# Altium PCB BOARD.PcbDoc
Units mm, origin at the board's own origin, x right, y up, seen from the top; angles counter-clockwise.
Board outline 16 x 24 mm, 2 copper layers (Top Layer, Bottom Layer), stack 0.46 mm thick; 61 components, 35 nets, 149 pads, 0 vias.
Unrouted connection lines stored in the file: 110.
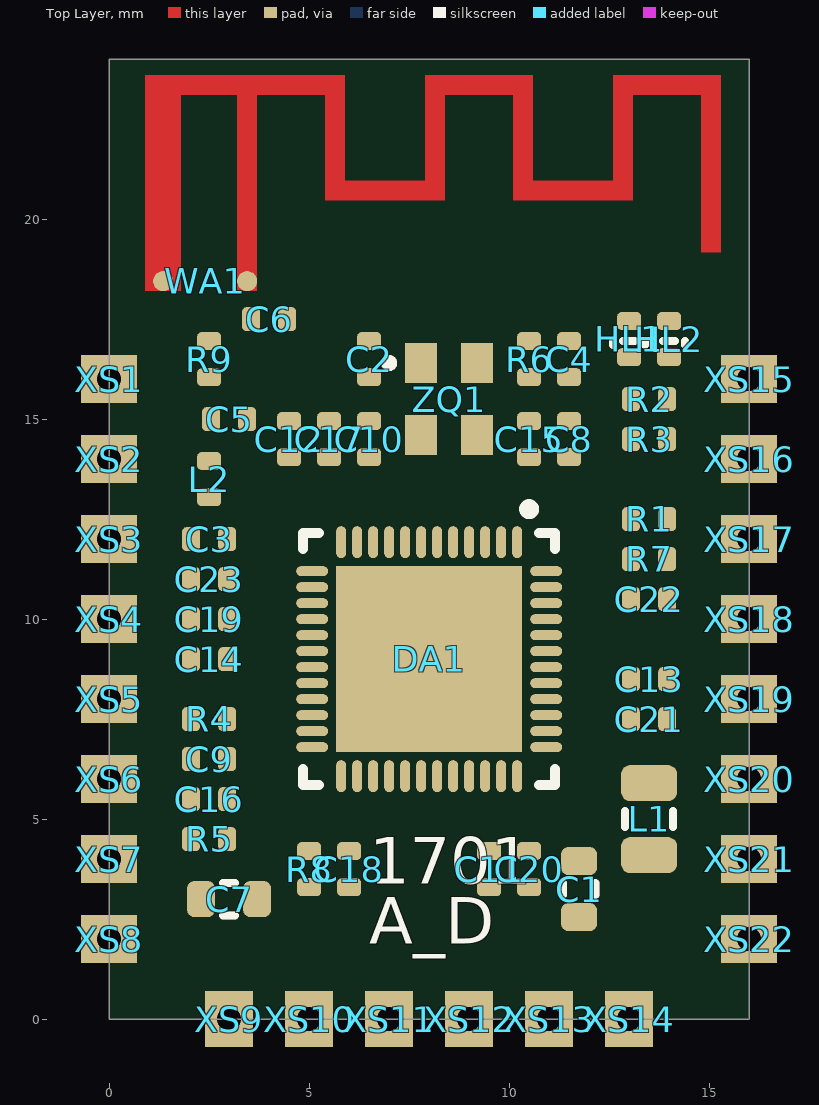
[diagram p0: Top Layer view]
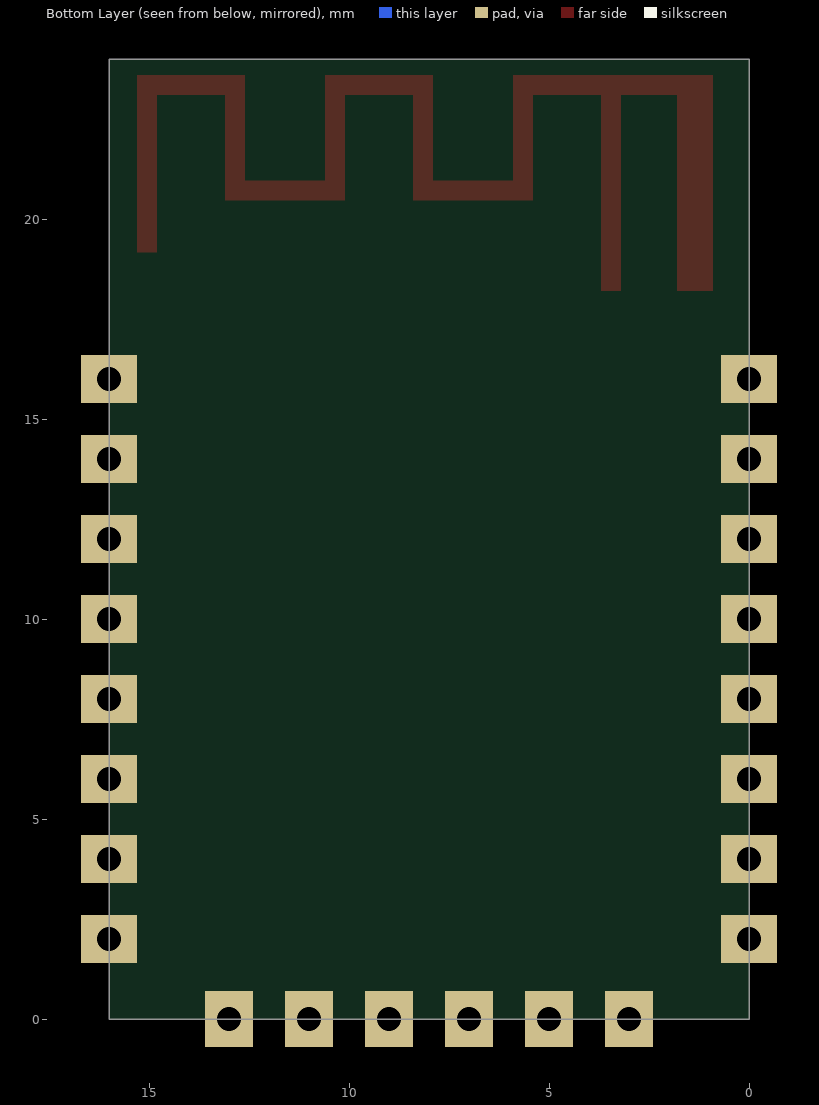
[diagram p1: Bottom Layer view, seen from below]

## Layer stack, top to bottom
Top Solder: solder mask 0.01, Solder Resist, Dk 3.5
Top Layer: signal copper 0.03
Dielectric1: core 0.4, FR-4, Dk 4.2
Bottom Layer: signal copper 0.03
Bottom Solder: solder mask 0.01, Solder Resist, Dk 3.5

## Board outline
0,0 16,0 16,24 0,24

## Design rules (kind name [scope] priority, off if disabled: settings)
Clearance Clearance_ANT [InNetClass('ANT_Class') vs InPolygon] p1: gap=0.6
Clearance Clearance_GND_Poly [(InNet('GND') AND InPolygon )] p2: gap=0.2
Clearance [All] p3: gap=0.15
ComponentClearance [All] p1 off: gap=0.25 collisioncheckmode=3 verticalgap=0.25 showdistances=FALSE
DiffPairsRouting [All] p1: maxlimit=0.4 minlimit=0.15 mostfreqgap=0.25 toplayer_minwidth=0.2 toplayer_maxwidth=0.4 toplayer_prefwidth=0.25 bottomlayer_minwidth=0.2 bottomlayer_maxwidth=0.4 bottomlayer_prefwidth=0.25 maxuncoupledlength=12
Height [All] p1: minheight=0 maxheight=25 prefheight=25
HoleSize [All] p1: absolutevalues=TRUE maxlimit=6 minlimit=0.3 maxpercent=80.000 minpercent=20.000
HoleToHoleClearance [All] p1: gap=0.25 allowstackedmicrovias=TRUE
MinimumSolderMaskSliver [All] p1 off: minsoldermaskwidth=0.254
PlaneClearance [All] p1: clearance=0.5
PlaneConnect [All] p1: planeconnectstyle=Relief reliefexpansion=0.5 reliefentries=4 reliefconductorwidth=0.25 reliefairgap=0.25
PolygonConnect PolygonConnect_XW1 [InComponent('XW1') vs IsPolygon] p1: connectstyle=Direct reliefconductorwidth=0.254 reliefentries=4 polygonreliefangle="90 Angle" airgapwidth=0.254
PolygonConnect PolygonConnect_Components [InComponent('C*') OR InComponent('R*') OR InComponent('NR*') OR InComponent('DA*') OR InComponent('DD*') OR InComponent('HL*')] p2: connectstyle=Relief reliefconductorwidth=0.2 reliefentries=4 polygonreliefangle="90 Angle" airgapwidth=0.25
PolygonConnect PolygonConnect_Connectors [All vs (InPadClass('All Pads'))] p3: connectstyle=Relief reliefconductorwidth=0.6 reliefentries=4 polygonreliefangle="90 Angle" airgapwidth=0.3
PolygonConnect PolygonConnect_Via [All] p4: connectstyle=Direct reliefconductorwidth=0.254 reliefentries=4 polygonreliefangle="90 Angle" airgapwidth=0.254
RoutingCorners [All] p1: cornerstyle=45-Degree minsetback=1.5 maxsetback=3.5
RoutingVias [All] p1: holewidth=0.6 width=1.2 viastyle="Through Hole" minholewidth=0.3 minwidth=0.6 maxholewidth=1 maxwidth=2
SMDEntry [All] p1: side=TRUE corner=TRUE anyangle=TRUE
SilkToSilkClearance [All] p1 off: silktosilkclearance=0.254
SilkToSolderMaskClearance [IsPad] p1 off: minsilkscreentomaskgap=0.254 clearancetoexposedcopper=TRUE
SolderMaskExpansion [All] p1: expansion=0.1
Width [All] p1: maxlimit=8 minlimit=0.2 preferedwidth=0.6
Width Width_TrackEnds [All] p2 off: maxlimit=0.25 minlimit=0.25 preferedwidth=0.25 checkconnectedcopper=TRUE
19 further rules are at their usual default settings.

## Components (designator, comment, footprint, x,y, rotation, side; value= is the part's Value field where it differs from the comment)
C1 "Capacitor" C0603_L 11.75,3.25 r90 top
C2 "Capacitor" C0402_L 6.5,16.5 r270 top
C3 "Capacitor" C0402_L 2.5,12 r0 top
C4 "Capacitor" C0402_L 11.5,16.5 r270 top
C5 "Capacitor" C0402_L 3,15 r180 top
C6 "Capacitor" C0402_L 4,17.5 r180 top
C7 "Capacitor" C0603_L 3,3 r180 top
C8 "Capacitor" C0402_L 11.5,14.5 r270 top
C9 "Capacitor" C0402_L 2.5,6.5 r0 top
C10 "Capacitor" C0402_L 6.5,14.5 r270 top
C11 "Capacitor" C0402_L 9.5,3.75 r90 top
C12 "Capacitor" C0402_L 4.5,14.5 r270 top
C13 "Capacitor" C0402_L 13.5,8.5 r180 top
C14 "Capacitor" C0402_L 2.5,9 r0 top
C15 "Capacitor" C0402_L 10.5,14.5 r270 top
C16 "Capacitor" C0402_L 2.5,5.5 r0 top
C17 "Capacitor" C0402_L 5.5,14.5 r270 top
C18 "Capacitor" C0402_L 6,3.75 r90 top
C19 "Capacitor" C0402_L 2.5,10 r0 top
C20 "Capacitor" C0402_L 10.5,3.75 r90 top
C21 "Capacitor" C0402_L 13.5,7.5 r180 top
C22 "Capacitor" C0402_L 13.5,10.5 r180 top
C23 "Capacitor" C0402_L 2.5,11 r0 top
DA1 "RTL871xAF" QFN-48-6x6 8,9 r270 top
HL1 "G" LD0402_L 13,17 r270 top
HL2 "B" LD0402_L 14,17 r270 top
L1 "FerriteBead" L0805_L 13.5,5 r90 top
L2 "Coil" L0402_L 2.5,13.5 r90 top
R1 "Resistor" R0402_L 13.5,12.5 r180 top
R2 "Resistor" R0402_L 13.5,15.5 r0 top
R3 "Resistor" R0402_L 13.5,14.5 r0 top
R4 "Resistor" R0402_L 2.5,7.5 r0 top
R5 "Resistor" R0402_L 2.5,4.5 r180 top
R6 "Resistor" R0402_L 10.5,16.5 r270 top
R7 "Resistor" R0402_L 13.5,11.5 r0 top
R8 "Resistor" R0402_L 5,3.75 r90 top
R9 "Resistor" R0402_L 2.5,16.5 r90 top
WA1 "Antenna_PCB_2p" PCB-AN043 8,21 r0 top net-tie
XS1 "PCB-SPIN" PCB-SPIN 0,16 r90 top
XS2 "PCB-SPIN" PCB-SPIN 0,14 r90 top
XS3 "PCB-SPIN" PCB-SPIN 0,12 r90 top
XS4 "PCB-SPIN" PCB-SPIN 0,10 r90 top
XS5 "PCB-SPIN" PCB-SPIN 0,8 r90 top
XS6 "PCB-SPIN" PCB-SPIN 0,6 r90 top
XS7 "PCB-SPIN" PCB-SPIN 0,4 r90 top
XS8 "PCB-SPIN" PCB-SPIN 0,2 r90 top
XS9 "PCB-SPIN" PCB-SPIN 3,0 r180 top
XS10 "PCB-SPIN" PCB-SPIN 5,0 r180 top
XS11 "PCB-SPIN" PCB-SPIN 7,0 r180 top
XS12 "PCB-SPIN" PCB-SPIN 9,0 r180 top
XS13 "PCB-SPIN" PCB-SPIN 11,0 r180 top
XS14 "PCB-SPIN" PCB-SPIN 13,0 r180 top
XS15 "PCB-SPIN" PCB-SPIN 16,16 r90 top
XS16 "PCB-SPIN" PCB-SPIN 16,14 r90 top
XS17 "PCB-SPIN" PCB-SPIN 16,12 r90 top
XS18 "PCB-SPIN" PCB-SPIN 16,10 r90 top
XS19 "PCB-SPIN" PCB-SPIN 16,8 r90 top
XS20 "PCB-SPIN" PCB-SPIN 16,6 r90 top
XS21 "PCB-SPIN" PCB-SPIN 16,4 r90 top
XS22 "PCB-SPIN" PCB-SPIN 16,2 r90 top
ZQ1 "Crystal" SX-2520 8.5,15.5 r270 top

## Footprints (in the part's own frame and the unit in brackets; to place one, negate y for a bottom-side part, rotate by r counter-clockwise, add the part's x,y. Pads: shape width x height; smd on the part's side, far side on the other; paste and mask are expansions set on the pad)
C0402_L [mm] "Chip Capacitor; Body 1.0 x 0.5 mm (LxW typ)"
  rrect50% 0.45x0.6 smd mask+0.05: 1(-0.452,0) 2(0.452,0)
  body extent -0.5,-0.25 0.5,0.25, height 0.61
C0603_L [mm] "Chip Capacitor; Body 1.6 x 0.8 mm (LxW typ)"
  rrect50% 0.7x0.9 smd mask+0.05: 1(-0.7,0) 2(0.7,0)
  silkscreen extent -0.15,-0.41 0.15,0.41, body extent -0.79,-0.41 0.81,0.39, height 0.8
L0402_L [mm] "Chip Coil; Body 1.0 x 0.5 mm (LxW typ)"
  rrect50% 0.45x0.6 smd mask+0.05: 1(-0.452,0) 2(0.452,0)
  Top Layer pour cut-out: -0.325,0.3 0.325,0.3 0.325,-0.3 -0.325,-0.3
  body extent -0.5,-0.3 0.5,0.3, height 0.5
L0805_L [mm] "Chip Coil; Body 2.0 x 1.2 mm (LxW typ)"
  rrect50% 0.9x1.4 smd mask+0.07: 1(-0.9,0) 2(0.9,0)
  Top Layer pour cut-out: -0.65,0.7 0.65,0.7 0.65,-0.7 -0.65,-0.7
  silkscreen extent -0.2,-0.6 0.2,0.6, body extent -0.97,-0.65 1.03,0.65, height 1.2
LD0402_L [mm] "Chip Led; Body 1.0 x 0.5 mm (LxW typ)"
  rrect50% 0.45x0.6 smd mask+0.05: 1(-0.452,0) 2(0.452,0)
  silkscreen extent 0.05,-0.4 0.15,0.4, body extent -0.5,-0.3 0.5,0.3, height 0.2
PCB-AN043 [mm]
  round 0.5 smd: 1(-4.55,-2.55) 2(-6.65,-2.55)
  Top Layer region: 7.3,-1.84 7.3,2.1 6.8,2.1 6.8,-1.84
  Top Layer region: 7.3,2.6 4.6,2.6 4.6,2.1 7.3,2.1
  Top Layer region: 5.1,-0.54 5.1,2.1 4.6,2.1 4.6,-0.54
  Top Layer region: 4.6,-0.04 2.6,-0.04 2.6,-0.54 4.6,-0.54
  Top Layer region: 2.6,-0.54 2.6,2.1 2.1,2.1 2.1,-0.54
  Top Layer region: 2.6,2.6 -0.1,2.6 -0.1,2.1 2.6,2.1
  Top Layer region: 0.4,-0.54 0.4,2.1 -0.1,2.1 -0.1,-0.54
  Top Layer region: -0.1,-0.04 -2.1,-0.04 -2.1,-0.54 -0.1,-0.54
  Top Layer region: -2.1,-0.54 -2.1,2.1 -2.6,2.1 -2.6,-0.54
  Top Layer region: -4.3,-2.8 -4.3,2.1 -4.8,2.1 -4.8,-2.8
  Top Layer region: -7.1,2.1 -2.1,2.1 -2.1,2.6 -7.1,2.6
  Top Layer region: -7.1,-2.8 -6.2,-2.8 -6.2,2.1 -7.1,2.1
  Multi-Layer pour cut-out: -7.6,-2.3 -7.6,2.9 7.6,2.9 7.6,-2.3
PCB-SPIN [mm]
  rect 1.2x1.4 hole 0.6: 1(0,0)
QFN-48-6x6 [mm] "QFN, 48-Leads, Body 6,00x6,00mm, Pitch 0,40mm, Thermal Pad 4,65x4,65mm, IPC Medium Density"
  oval 0.8x0.25 smd mask+0.08: 1(-2.925,2.2) 2(-2.925,1.8) 3(-2.925,1.4) 4(-2.925,1) 5(-2.925,0.6) 6(-2.925,0.2) 7(-2.925,-0.2) 8(-2.925,-0.6) 9(-2.925,-1) 10(-2.925,-1.4) 11(-2.925,-1.8) 12(-2.925,-2.2) 25(2.925,-2.2) 26(2.925,-1.8) 27(2.925,-1.4) 28(2.925,-1) 29(2.925,-0.6) 30(2.925,-0.2) 31(2.925,0.2) 32(2.925,0.6) 33(2.925,1) 34(2.925,1.4) 35(2.925,1.8) 36(2.925,2.2)
  oval 0.25x0.8 smd mask+0.08: 13(-2.2,-2.925) 14(-1.8,-2.925) 15(-1.4,-2.925) 16(-1,-2.925) 17(-0.6,-2.925) 18(-0.2,-2.925) 19(0.2,-2.925) 20(0.6,-2.925) 21(1,-2.925) 22(1.4,-2.925) 23(1.8,-2.925) 24(2.2,-2.925) 37(2.2,2.925) 38(1.8,2.925) 39(1.4,2.925) 40(1,2.925) 41(0.6,2.925) 42(0.2,2.925) 43(-0.2,2.925) 44(-0.6,2.925) 45(-1,2.925) 46(-1.4,2.925) 47(-1.8,2.925) 48(-2.2,2.925)
  rect 4.65x4.65 smd mask+0.05: 49(0,0)
  silkscreen extent -3.87,-3.15 3.15,3.15, body extent -3.05,-3.05 3.05,3.05, height 1
R0402_L [mm] "Chip Resistor; Body 1.0 x 0.5 mm (LxW typ)"
  rrect50% 0.45x0.6 smd mask+0.05: 1(-0.452,0) 2(0.452,0)
  body extent -0.5,-0.25 0.5,0.25, height 0.4
SX-2520 [mm]
  rect 1x0.8 smd: 1(-0.9,-0.7) 2(0.9,-0.7) 3(0.9,0.7) 4(-0.9,0.7)
  silkscreen extent -1,-1.6 -0.8,-1.4, body extent -1.25,-1 1.25,1, height 0.55

## Part data
C1: library part GRM188R60J106ME47D
C2 C4: library part GRM1555C1H4R0CZ01D
C3 C5 C6: library part GRM1555C1H100JA01D
C7: library part GRM188R61A475KE15D
C8 C9 C10 C11 C12 C13 C14 C15 C16 C18 C20 C21 C22: library part GRM155R71A104KA01D
C17 C19 C23: library part GRM155R61A105KE15D
DA1: library part RTL8711AF
HL1: library part KPHHS-1005MGCK
HL2: library part KPHHS-1005QBC-D-V
L1: library part BLM21PG331SN1
L2: library part LQG15HS2N2S02D
R1 R8: library part RC0402FR-0710KL
R2: library part RC0402JR-07430RL
R3: library part RC0402JR-074K7L
R4 R6 R7 R9: library part RC0402JR-070RL
R5: library part RC0402JR-07100KL
WA1: library part PCB-AN043
ZQ1: library part CX2520DB40000D0FLJCC

## Nets (pads, with @x,y where several pads share a name; then routed paths per layer and width w, separated by ;. In a path a pad name is that pad's centre, name@x,y a point inside that pad or via, vN(x,y) a via of type N, cw(c..) or ccw(c..) an arc to the next point about the centre after c; other vN are vias at no path point)
CH_EN: DA1.24 R5.1 XS3.1
GND: C1.1 C2.1 C3.1 C4.1 C5.1 C6.1 C7.1 C8.1 C9.1 C10.1 C11.1 C12.1 C13.1 C14.1 C15.1 C16.1 C17.1 C18.1 C19.1 C20.1 C21.1 C22.1 C23.1 DA1.38 DA1.49 R1.1 R8.1 WA1.2 XS22.1
GPIOA0: DA1.27 XS13.1
GPIOA1: DA1.28 XS12.1
GPIOA2: DA1.29 XS9.1
GPIOA3: DA1.31 XS14.1
GPIOA4: DA1.32 HL2.2 XS20.1
GPIOA5: DA1.33 XS11.1
GPIOB0: DA1.48 HL1.2 R1.2 XS15.1
GPIOB1: DA1.1 XS16.1
GPIOB2: DA1.2 R3.1
GPIOB3: DA1.3
GPIOC0: DA1.44 XS19.1
GPIOC1: DA1.43 XS17.1
GPIOC2: DA1.42 XS1.1
GPIOC3: DA1.41 XS18.1
GPIOC4: DA1.46 XS10.1
GPIOC5: DA1.47 R7.1 XS2.1
GPIOE0: DA1.21 XS21.1
GPIOE1: R4.1 R7.2 XS5.1
GPIOE2: DA1.19 XS7.1
GPIOE3: DA1.18 XS6.1
GPIOE4: DA1.17 XS4.1
GPIOF5: DA1.25 R8.2
NetC2_2: C2.2 DA1.8 ZQ1.1
NetC3_2: C3.2 DA1.13 L2.1
NetC4_2: C4.2 R6.2 ZQ1.3
NetC5_2: C5.2 L2.2 R9.1
NetC6_2: C6.2 R9.2 WA1.1
NetDA1_9: DA1.9 R6.1
NetDA1_20: DA1.20 R4.2
NetDA1_37: DA1.37 L1.2
NetHL1_1: HL1.1 HL2.1 R2.1
VCC1P2: C1.2 C9.2 C11.2 C13.2 C15.2 C17.2 C19.2 DA1.7 DA1.11 DA1.15 DA1.22 DA1.34 DA1.40 L1.1
VCC3P3: C7.2 C8.2 C10.2 C12.2 C14.2 C16.2 C18.2 C20.2 C21.2 C22.2 C23.2 DA1.4 DA1.10 DA1.12 DA1.14 DA1.16 DA1.23 DA1.26 DA1.30 DA1.35 DA1.36 DA1.39 DA1.45 R2.2 R3.2 R5.2 XS8.1
pads on no net: DA1.5 DA1.6 ZQ1.2 ZQ1.4

## Silkscreen, mask and mechanical layers (free items; w line width, h text height)
Top Overlay:
  text "1701" at 6.5,3 h2
  text "A_D" at 6.5,1.5 h2
  text "ADC0" at 34.2,-6.3 h2
Top Solder:
  rectangle: 0.4,18.7 15.6,23.9
1 - Board Outline:
  the board outline again, w0.1
11 - Dementions (Top):
  lines w0.254: -2.508,1.524 -2,0 ; -2.508,22.476 -2,24 ; -2.254,0 -1.746,0 ; -2.254,24 -1.746,24 ; -2,6.896 -2,0 ; -2,17.104 -2,24 ; -1.492,1.524 -2,0 ; -1.492,22.476 -2,24 ; 0,-2.254 0,-1.746 ; 1.524,-2.508 0,-2 ; 1.524,-1.492 0,-2 ; 3.023,-2 0,-2 ; 12.977,-2 16,-2 ; 14.476,-2.508 16,-2 ; 14.476,-1.492 16,-2 ; 16,-2.254 16,-1.746
  text "24 (mm)" at -1.086,7.15 h1.52 r90
  text "16 (mm)" at 3.277,-2.914 h1.52